# Altium PCB _Mainboard.PcbDoc (part 2 of 2)
Units mm, origin at the board's own origin, x right, y up, seen from the top; angles counter-clockwise.
Board outline 140.34 x 91.44 mm, 2 copper layers (Top Layer, Bottom Layer); 97 components, 48 nets, 329 pads, 204 vias.
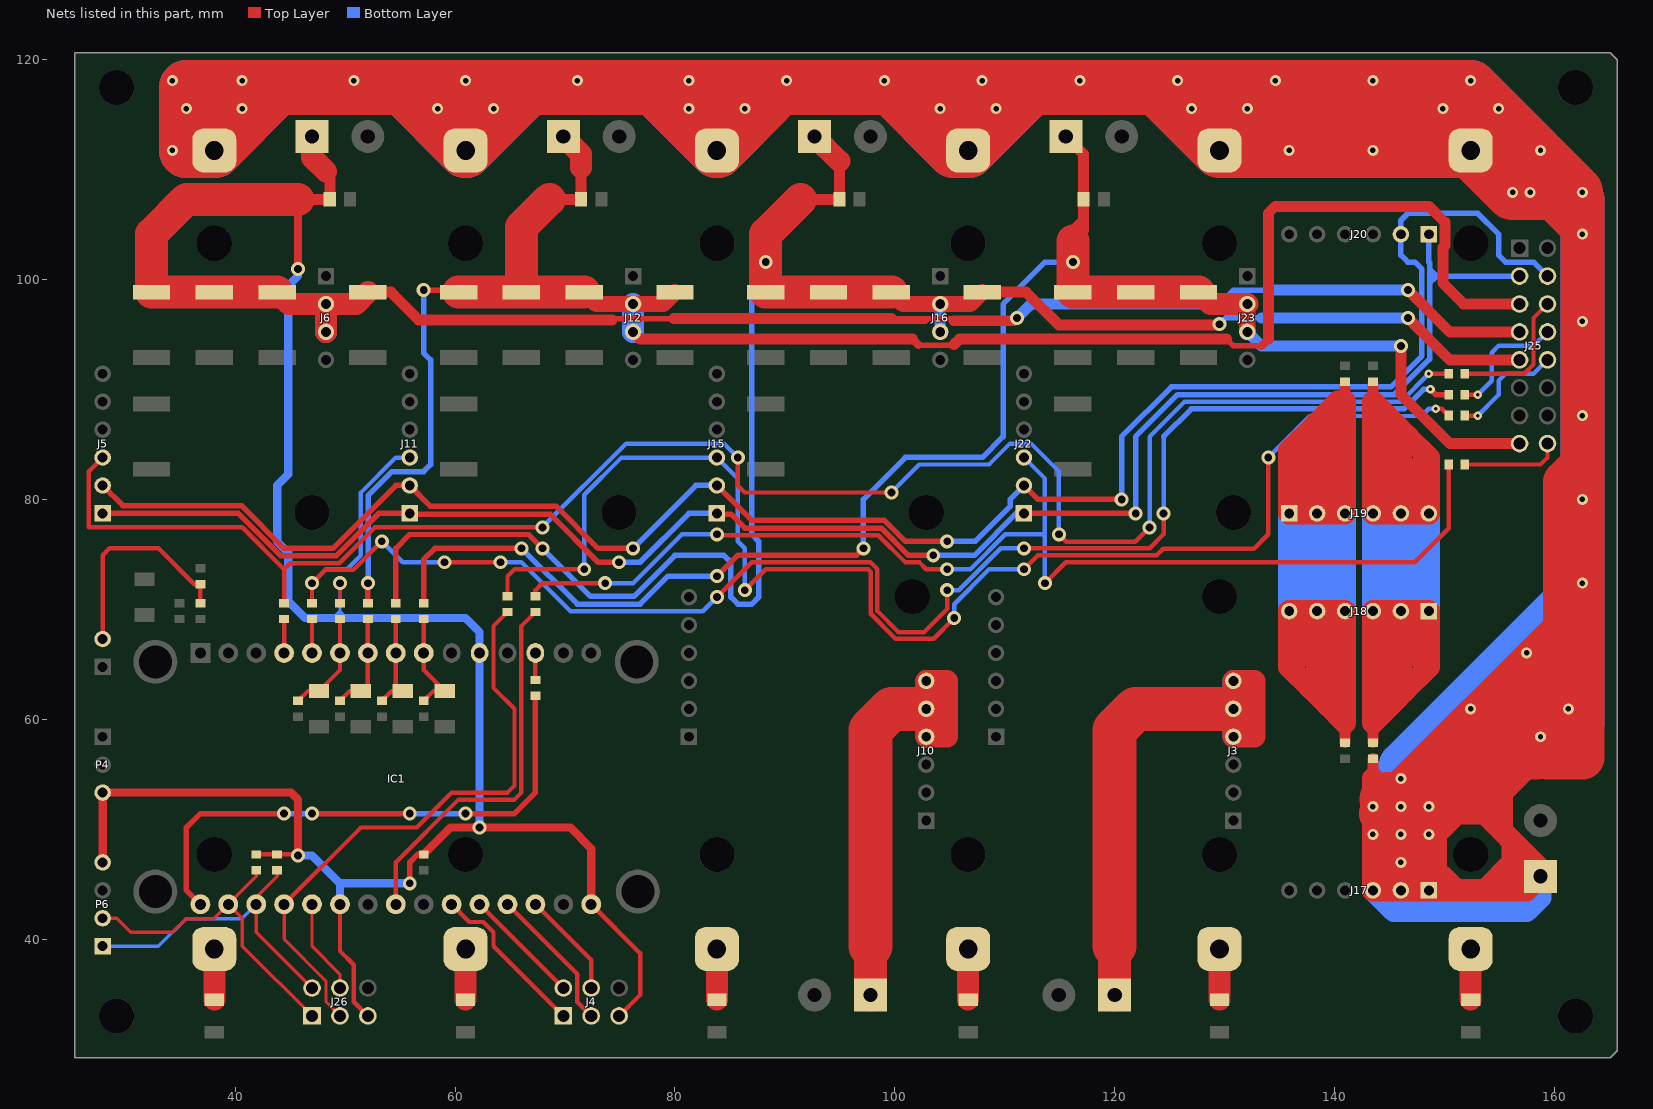
[diagram p2: the nets of this part, all layers, seen from the top]

## Via types
v1: diameter 1, hole 0.5, Top Layer to Bottom Layer, tented both sides, 99 vias
v2: diameter 1.27, hole 0.711, Top Layer to Bottom Layer, tented both sides, 70 vias
v3: diameter 1.2, hole 0.5, Top Layer to Bottom Layer, tented both sides, 30 vias
v4: diameter 0.8, hole 0.3, Top Layer to Bottom Layer, tented both sides, 5 vias

## Nets (pads, with @x,y where several pads share a name; then routed paths per layer and width w, separated by ;. In a path a pad name is that pad's centre, name@x,y a point inside that pad or via, vN(x,y) a via of type N, cw(c..) or ccw(c..) an arc to the next point about the centre after c; other vN are vias at no path point) (continued)
GND_BAT: J17.1 J17.2 J17.3 J24.1 JMP3.1 U1.2 U2.2 U3.2 U4.2 U5.2 U6.2 | length 1007.2
  Top Layer w1: 143.51,54.61 JMP3.1@143.51,56.425
  Top Layer w2: v1(148.59,49.53) 147.637,50.482 ; 150.495,51.435 146.685,51.435 ; 150.812,54.292 153.67,51.435 ; 153.035,56.515 153.67,55.88 153.67,51.435 ; 155.575,56.515 155.257,56.197 155.257,53.34 ; 159.385,56.515 158.433,56.515 155.257,53.34 ; 144.78,44.45 J17.2@146.05,44.45 ; 144.78,44.45 J17.3@143.51,44.45 v1(143.51,49.53) v1(143.51,52.07) 143.51,54.61 145.097,53.023 ; 144.78,44.45 144.78,51.991 144.78,52.705 145.097,53.023 ; 145.097,53.023 145.415,52.705 145.455,52.666 v1(146.05,52.07) ; J17.2@146.05,44.45 147.32,44.45 ; J17.2@146.05,44.45 v1(146.05,46.99) v1(146.05,49.53) v1(146.05,52.07) ; v1(146.05,52.07) 146.685,51.435 ; 146.685,51.435 147.637,50.482 ; 147.32,44.45 J17.1@148.59,44.45 ; 147.32,44.45 147.637,44.767 147.637,50.482 ; J17.1@148.59,44.45 149.86,44.45 ; J17.1@148.59,44.45 148.59,45.72 ; 148.59,45.72 149.225,46.355 149.225,49.53 151.13,51.435 153.67,51.435 ; 148.59,45.72 149.86,44.45 ; 148.59,45.72 149.86,45.72 151.13,44.45 ; 149.86,44.45 151.13,44.45 ; 151.13,44.45 153.67,44.45 ; 153.67,44.45 154.94,44.45 ; 153.67,44.45 156.21,46.99 ; 153.67,51.435 155.257,49.847 ; 154.94,44.45 157.48,44.45 J24.1@158.75,45.72 ; 154.94,44.45 156.21,45.72 ; 155.257,49.847 156.21,48.895 ; 155.257,49.847 155.257,53.34 ; 156.21,45.72 156.21,46.99 ; 156.21,45.72 J24.1@158.75,45.72 ; 156.21,46.99 156.21,48.895 ; 156.21,48.895 158.75,46.355 J24.1@158.75,45.72
  Top Layer w4: 144.224,51.435 144.78,51.991 145.455,52.666 145.494,52.705 160.972,68.183 ; 149.225,52.705 150.812,54.292 153.035,56.515 ; 158.433,56.515 155.575,56.515 153.035,56.515 ; 159.385,107.95 162.56,104.775 ; 161.925,107.95 162.56,107.315 162.56,104.775 ; 153.035,56.515 158.75,62.23 ; 158.75,62.23 159.385,61.595 159.385,56.515 162.56,56.515 162.56,66.04 ; 158.75,62.23 160.972,64.453 ; 160.972,64.453 160.972,68.183 ; 160.972,64.453 162.56,66.04 ; 160.972,68.183 162.56,69.771 ; 160.972,68.183 160.972,81.597 162.56,83.185 ; 162.56,66.04 162.56,69.771 ; 162.56,69.771 v1(162.56,72.39) v1(162.56,80.01) 162.56,83.185 ; 162.56,83.185 v1(162.56,87.63) v1(162.56,96.203) v1(162.56,104.14) 162.56,104.775
  Top Layer w5: 144.78,52.705 145.415,52.705 145.494,52.705 149.225,52.705 ; 37.465,117.475 35.56,117.475 35.56,111.76 U6.2@38.1,111.76 ; 37.465,117.475 38.1,116.84 U6.2@38.1,111.76 ; 37.465,117.475 43.815,117.475 ; U6.2@38.1,111.76 43.815,117.475 ; 43.815,117.475 55.245,117.475 ; 55.245,117.475 U5.2@60.96,111.76 66.675,117.475 ; 55.245,117.475 66.675,117.475 ; 66.675,117.475 78.105,117.475 ; 78.105,117.475 U4.2@83.82,111.76 89.535,117.475 ; 78.105,117.475 89.535,117.475 ; 89.535,117.475 99.695,117.475 ; 99.695,117.475 105.41,111.76 U3.2@106.68,111.76 ; 99.695,117.475 106.045,117.475 ; 106.045,117.475 106.68,116.84 U3.2@106.68,111.76 ; 106.045,117.475 112.395,117.475 ; U3.2@106.68,111.76 112.395,117.475 ; 112.395,117.475 123.825,117.475 ; 123.825,117.475 127.317,113.983 ; 123.825,117.475 152.4,117.475 161.925,107.95 159.385,107.95 v1(157.797,107.95) v1(156.21,107.95) U1.2@152.4,111.76 ; 127.317,113.983 U2.2@129.54,111.76 v1(135.89,111.76) v1(143.51,111.76) U1.2@152.4,111.76 ; 127.317,113.983 150.177,113.983 U1.2@152.4,111.76
  Bottom Layer w2: J17.3@143.51,44.45 143.51,46.355 146.05,46.355 147.955,46.355 149.86,44.45 ; J17.3@143.51,44.45 145.415,42.545 157.48,42.545 158.75,43.815 J24.1@158.75,45.72 ; J17.3@143.51,44.45 J17.2@146.05,44.45 J17.1@148.59,44.45 149.86,44.45 ; 149.86,44.45 155.575,44.45 ; 155.575,44.45 156.845,45.72 J24.1@158.75,45.72 ; 155.575,44.45 157.48,44.45 J24.1@158.75,45.72
  Bottom Layer w4: 123.19,117.475 128.905,111.76 U2.2@129.54,111.76 ; 129.54,116.84 U2.2@129.54,111.76 ; J17.2@146.05,44.45 146.05,46.355 ; v1(158.75,111.76) 161.29,109.22 161.29,108.585 ; U2.2@129.54,111.76 v1(135.89,111.76) v1(143.51,111.76) U1.2@152.4,111.76 155.575,108.585 161.29,108.585 ; 149.86,57.15 154.94,57.15 ; 149.86,57.15 146.05,53.34 v1(146.05,54.61) 146.05,55.88 v1(162.56,72.39) ; 149.86,57.15 162.56,69.85 ; 154.94,57.15 160.02,57.15 162.56,59.69 162.56,64.77 ; 154.94,57.15 162.56,64.77 ; 161.29,108.585 162.56,107.315 v1(162.56,104.14) v1(162.56,96.203) v1(162.56,87.63) v1(162.56,80.01) v1(162.56,72.39) ; 162.56,64.77 162.56,69.85 ; 162.56,69.85 v1(162.56,72.39)
  Bottom Layer w5: U1.2@152.4,111.76 149.542,114.617 ; 158.115,111.76 152.4,117.475 146.685,117.475 ; U6.2@38.1,111.76 35.56,111.76 35.56,117.475 38.735,117.475 ; U6.2@38.1,111.76 38.1,116.84 38.735,117.475 ; U6.2@38.1,111.76 43.815,117.475 ; 38.735,117.475 43.815,117.475 ; 43.815,117.475 55.245,117.475 ; 55.245,117.475 U5.2@60.96,111.76 ; 55.245,117.475 60.96,117.475 ; U5.2@60.96,111.76 60.96,117.475 ; U5.2@60.96,111.76 66.675,117.475 ; 60.96,117.475 66.675,117.475 ; 66.675,117.475 78.105,117.475 ; 78.105,117.475 U4.2@83.82,111.76 ; 78.105,117.475 83.185,117.475 ; 83.185,117.475 83.82,116.84 U4.2@83.82,111.76 ; 83.185,117.475 88.265,117.475 ; U4.2@83.82,111.76 88.265,116.205 88.265,117.475 ; 88.265,117.475 99.695,117.475 ; 99.695,117.475 105.41,111.76 U3.2@106.68,111.76 ; 99.695,117.475 106.045,117.475 ; 106.045,117.475 106.68,116.84 U3.2@106.68,111.76 ; 106.045,117.475 112.395,117.475 ; U3.2@106.68,111.76 112.395,117.475 ; 112.395,117.475 123.19,117.475 130.175,117.475 ; 130.175,117.475 129.54,116.84 131.762,114.617 149.542,114.617 ; 130.175,117.475 146.685,117.475 ; 146.685,117.475 149.542,114.617
  Bottom Layer w7: 146.05,46.355 v1(146.05,46.99) v1(146.05,49.53) v1(146.05,52.07) 146.05,53.34
  other v1: 148.59,52.07 158.75,58.42 152.4,60.96 161.29,60.96 157.48,66.04 162.56,107.95 34.29,111.76 35.56,115.57 40.64,115.57 58.42,115.57 63.5,115.57 81.28,115.57 86.36,115.57 104.14,115.57 109.22,115.57 127,115.57 132.08,115.57 149.86,115.57 154.94,115.57 34.29,118.11 40.64,118.11 50.8,118.11 60.96,118.11 71.12,118.11 81.28,118.11 90.17,118.11 99.06,118.11 107.95,118.11 116.84,118.11 125.73,118.11 134.62,118.11 143.51,118.11 152.4,118.11
GND_BMS: J18.1 J18.2 J18.3 J19.4 J19.5 J19.6 JMP3.2 JMP4.1 | length 156
  Top Layer w1: JMP3.2@143.51,57.875 143.51,59.69 ; 143.51,88.9 JMP4.1@143.51,90.536
  Top Layer w2: 144.78,69.85 144.78,62.23 145.415,61.595 ; 144.78,69.85 J18.2@146.05,69.85 ; 144.78,69.85 J18.3@143.51,69.85 143.51,59.69 145.415,61.595 ; 144.78,78.74 144.78,86.36 145.415,86.995 ; 144.78,78.74 J19.5@146.05,78.74 ; 144.78,78.74 J19.4@143.51,78.74 143.51,88.9 145.415,86.995 ; 145.415,61.595 146.368,62.547 ; 145.415,86.995 146.685,85.725 ; J18.2@146.05,69.85 147.32,69.85 ; J18.2@146.05,69.85 146.05,62.865 146.368,62.547 ; J19.5@146.05,78.74 147.32,78.74 ; J19.5@146.05,78.74 146.05,85.09 146.685,85.725 ; 146.368,62.547 148.59,64.77 ; 146.685,85.725 148.59,83.82 ; 147.32,69.85 147.32,66.04 148.59,64.77 ; 147.32,69.85 J18.1@148.59,69.85 148.59,64.77 ; 147.32,78.74 147.32,82.55 148.59,83.82 ; 147.32,78.74 J19.6@148.59,78.74 148.59,83.82
  Bottom Layer w2: 144.78,69.85 144.78,78.74 ; 144.78,69.85 J18.2@146.05,69.85 ; 144.78,69.85 J18.3@143.51,69.85 J19.4@143.51,78.74 144.78,78.74 ; 144.78,78.74 J19.5@146.05,78.74 ; J18.2@146.05,69.85 147.32,69.85 ; J18.2@146.05,69.85 J19.5@146.05,78.74 ; J19.5@146.05,78.74 147.32,78.74 ; 147.32,69.85 147.32,78.74 ; 147.32,69.85 J18.1@148.59,69.85 J19.6@148.59,78.74 147.32,78.74
NetC1_2: C1.2 C2.2 C3.2 C4.2 C20.2 IC1.11 IC1.16 IC1.25 J1.1 J4.5 J6.2 J6.3 J25.7 J26.5 P4.3 P6.4 R2.2 R3.2 R4.2 R10.1 | length 340.4
  Top Layer w0.3: R10.1@49.53,70.575 v2(49.53,72.39)
  Top Layer w0.4: R3.2@41.91,47.715 R4.2@43.815,47.715 45.63,47.715 v2(45.72,47.625) ; IC1.25@49.53,43.18 49.53,38.938 50.784,37.684 50.784,34.306 J26.5@52.07,33.02 ; IC1.16@72.39,43.18 76.835,38.735 76.835,34.925 J4.5@74.93,33.02
  Top Layer w0.5: v2(55.88,45.085) 55.88,46.99 56.605,47.715 R2.2@57.15,47.715 ; 74.295,96.34 74.405,96.45 79.94,96.45 ; 102.76,96.34 102.87,96.45 105.226,96.45 105.41,96.266 ; v2@111.055,96.45 v2(111.125,96.52)
  Top Layer w0.75: P6.4@27.94,46.99 P4.3@27.94,53.34 45.085,53.34 45.72,52.705 v2(45.72,47.625) ; v2(45.72,100.965) 45.72,107.315 ; R2.2@57.15,47.715 59.6,50.165 v2(62.23,50.165) 70.485,50.165 72.39,48.26 IC1.16@72.39,43.18 ; 99.811,96.34 102.76,96.34
  Top Layer w1: 45.72,107.315 C20.2@48.605,107.315 48.605,109.51 48.26,109.855 ; C4.2@52.07,98.86 54.175,98.86 56.695,96.34 74.295,96.34 ; 79.94,96.45 99.701,96.45 ; 105.41,96.266 110.871,96.266 v2@111.055,96.45 ; v2(146.685,99.06) 150.495,95.25 J25.7@156.845,95.25
  Top Layer w2: C1.2@43.815,98.86 44.885,97.79 J6.2@48.26,97.79 ; J1.1@46.99,113.03 46.99,111.125 48.26,109.855 ; J6.3@48.26,95.25 J6.2@48.26,97.79 ; C4.2@52.07,98.86 51,97.79 J6.2@48.26,97.79
  Top Layer w3: C1.2@43.815,98.86 C2.2@38.1,98.86 C3.2@32.385,98.86 32.385,104.14 35.56,107.315 45.72,107.315
  Bottom Layer w0.3: 48.895,69.215 49.53,69.85 ; 49.53,69.215 49.53,69.85 ; v2(49.53,72.39) 49.53,69.85 ; 50.165,69.215 49.53,69.85
  Bottom Layer w0.5: 129.54,97.79 130.81,99.06 133.985,99.06
  Bottom Layer w0.75: v2(45.72,47.625) 46.99,47.625 49.53,45.085 ; v2(45.72,100.965) 45.72,100.33 44.815,99.425 44.815,82.28 43.815,81.28 43.815,76.2 44.815,75.2 44.815,70.755 46.355,69.215 48.895,69.215 49.53,69.215 50.165,69.215 60.96,69.215 62.23,67.945 IC1.11@62.23,66.04 v2(62.23,50.165) ; IC1.25@49.53,43.18 49.53,45.085 ; v2(55.88,45.085) 49.53,45.085
  Bottom Layer w1: v2(111.125,96.52) 112.395,97.79 129.54,97.79 ; 133.985,99.06 v2(146.685,99.06)
  Bottom Layer w2: J6.3@48.26,95.25 J6.2@48.26,97.79
NetC5_2: C5.2 C6.2 C7.2 C8.2 C21.2 J8.1 J12.2 J12.3 J25.5 R11.1 | length 178.7
  Top Layer w0.5: R11.1@52.07,70.575 v2(52.07,72.39) ; v2(57.15,99.06) 60.125,99.06 C5.2@60.325,98.86 ; 102.165,94.05 105.35,94.05 105.41,94.11 ; 130.175,94.615 130.81,93.98 133.35,93.98
  Top Layer w0.75: 101.6,94.615 102.165,94.05 ; 133.35,93.98 133.985,94.615
  Top Layer w1: 68.58,107.315 C21.2@71.465,107.315 71.465,110.2 ; J12.3@76.2,95.25 76.835,94.615 101.6,94.615 ; 105.41,94.11 105.915,94.615 130.175,94.615 ; 133.985,94.615 133.985,106.045 134.62,106.68 148.59,106.68 150.04,105.23 150.04,103.1 149.86,102.92 149.86,99.695 151.765,97.79 J25.5@156.845,97.79
  Top Layer w1.5: C7.2@71.755,98.86 72.825,97.79 J12.2@76.2,97.79 78.94,97.79 C8.2@80.01,98.86
  Top Layer w2: J8.1@69.85,113.03 71.465,111.415 71.465,110.2
  Top Layer w3: C5.2@60.325,98.86 C6.2@66.04,98.86 ; 68.58,107.315 66.04,104.775 C6.2@66.04,98.86 ; C7.2@71.755,98.86 C6.2@66.04,98.86
  Bottom Layer w0.5: v2(52.07,72.39) 52.085,72.405 52.085,80.376 54.259,82.55 57.15,82.55 57.785,83.185 57.785,92.71 57.15,93.345 v2(57.15,99.06)
  Bottom Layer w2: J12.3@76.2,95.25 J12.2@76.2,97.79
NetC9_2: C9.2 C10.2 C11.2 C12.2 C22.2 J14.1 J16.2 J16.3 J25.9 R12.1 | length 173.3
  Top Layer w0.5: R12.1@54.61,70.575 54.61,75.565 55.865,76.82 66.69,76.82 v2(67.945,75.565)
  Top Layer w1: 91.44,107.315 C22.2@94.96,107.315 94.96,110.78 ; C12.2@107.95,98.86 111.96,98.86 114.935,95.885 129.54,95.885 v2(129.54,95.95) ; v2(146.685,96.52) 150.495,92.71 J25.9@156.845,92.71
  Top Layer w1.5: C11.2@99.695,98.86 100.765,97.79 J16.2@104.14,97.79 106.88,97.79 C12.2@107.95,98.86
  Top Layer w2: J14.1@92.71,113.03 94.96,110.78
  Top Layer w3: 91.44,107.315 88.265,104.14 v2(88.265,101.6) C9.2@88.265,98.86 C10.2@93.98,98.86 C11.2@99.695,98.86
  Bottom Layer w0.5: v2(67.945,75.565) 72.325,71.185 76.265,71.185 80.01,74.93 84.455,74.93 85.09,74.295 85.09,71.12 ; 85.09,71.755 85.09,71.12 ; v2(88.265,101.6) 86.995,100.33 86.995,76.835 87.63,76.2 87.63,71.12 86.995,70.485 85.725,70.485 85.09,71.12 ; v2(129.54,95.95) 130.11,96.52 133.35,96.52
  Bottom Layer w1: J16.3@104.14,95.25 J16.2@104.14,97.79 ; 133.35,96.52 v2(146.685,96.52)
NetC13_2: C13.2 C14.2 C15.2 C23.2 J21.1 J23.2 J23.3 J25.15 R13.1 | length 156.6
  Top Layer w0.5: R13.1@57.15,70.575 57.15,74.559 58.156,75.565 v2(66.04,75.565) ; v2(83.82,73.025) 85.74,74.945 96.535,74.945 v2(97.155,75.565)
  Top Layer w1: J21.1@115.57,113.03 117.185,111.415 C23.2@117.185,107.315 117.185,105.41 ; 119.67,99.205 120.015,98.86 ; v2(146.05,93.98) 146.05,89.535 150.495,85.09 J25.15@156.845,85.09 ; 117.185,105.41 116.205,104.43 116.205,103.505 117.185,104.485 117.185,105.41
  Top Layer w1.5: J23.3@132.08,95.25 J23.2@132.08,97.79
  Top Layer w2: C15.2@127.635,98.86 128.705,97.79 J23.2@132.08,97.79
  Top Layer w3: 116.205,103.505 v2(116.205,101.6) C13.2@116.205,98.86 120.015,98.86 C14.2@121.92,98.86 C15.2@127.635,98.86
  Bottom Layer w0.5: v2(66.04,75.565) 71.12,70.485 76.835,70.485 79.375,73.025 v2(83.82,73.025) ; v2(97.155,75.565) 97.155,80.01 100.98,83.835 107.965,83.835 109.855,85.725 109.855,97.79 113.665,101.6 v2(116.205,101.6)
  Bottom Layer w1: J23.3@132.08,95.25 133.35,93.98 v2(146.05,93.98)
NetD1_1: D1.1 J25.16 | length 9.1
  Top Layer w0.4: D1.1@151.855,83.185 158.75,83.185 159.385,83.82 J25.16@159.385,85.09
NetD1_2: D1.2 D8.1 J22.3 | length 108.5
  Top Layer w0.4: D8.1@67.31,71.21 67.31,71.755 67.945,72.39 v2(73.66,72.39) ; v2(83.82,76.835) 83.9,76.755 98.505,76.755 100.98,74.28 102.25,74.28 102.87,73.66 v2(104.775,73.66) ; v2(113.665,72.39) 115.57,74.295 147.32,74.295 150.405,77.38 D1.2@150.405,83.185
  Bottom Layer w0.4: v2(73.66,72.39) 76.2,72.39 80.645,76.835 v2(83.82,76.835) ; v2(104.775,73.66) 106.888,73.66 110.063,76.835 113.665,76.835 ; J22.3@111.76,83.82 113.665,81.915 113.665,76.835 ; v2(113.665,72.39) 113.665,76.835
NetD2_1: D2.1 J25.10 | length 10.4
  Top Layer w0.4: D2.1@151.855,87.63 v4(153.035,87.63)
  Bottom Layer w0.4: v4(153.035,87.63) 154.94,89.535 154.94,90.805 155.575,91.44 158.115,91.44 J25.10@159.385,92.71
NetD2_2: D2.2 D7.1 J15.3 | length 125.9
  Top Layer w0.4: D7.1@64.77,71.21 64.77,73.025 65.405,73.66 v2(71.755,73.66) ; v2(86.36,71.755) 88.265,73.66 97.576,73.66 97.825,73.411 97.825,69.601 100.081,67.345 103.54,67.345 v2(105.41,69.215) ; v2(111.76,73.66) 113.03,74.93 123.825,74.93 124.425,75.53 132.68,75.53 133.985,76.835 v2(133.985,83.82) ; v4(149.225,88.265) 149.77,88.265 D2.2@150.405,87.63
  Bottom Layer w0.4: v2(71.755,73.66) 71.755,80.431 75.144,83.82 J15.3@83.82,83.82 85.725,81.915 85.725,76.2 86.36,75.565 v2(86.36,71.755) ; v2(105.41,69.215) 105.41,70.485 108.585,73.66 v2(111.76,73.66) ; v2(133.985,83.82) 137.765,87.6 147.925,87.6 148.59,88.265 v4(149.225,88.265)
NetD3_1: D3.1 J25.8 | length 11.4
  Top Layer w0.4: D3.1@151.855,89.535 v4(153.035,89.535)
  Bottom Layer w0.4: v4(153.035,89.535) 154.305,90.805 154.305,93.345 154.94,93.98 158.115,93.98 J25.8@159.385,95.25
NetD3_2: D3.2 D6.1 J11.3 | length 148.7
  Top Layer w0.4: D6.1@46.99,70.575 v2(46.99,72.39) 48.215,73.615 50.755,73.615 v2(53.34,76.2) ; v2(59.055,74.295) v2(64.135,74.295) ; v2(83.82,71.12) 86.995,74.295 97.79,74.295 98.425,73.66 98.425,69.85 100.33,67.945 102.676,67.945 104.775,70.044 v2(104.775,71.755) ; v2(111.76,75.565) 123.19,75.565 124.46,76.835 v2(124.46,78.74)
  Top Layer w0.5: v4(148.732,90.028) 149.225,89.535 D3.2@150.405,89.535
  Bottom Layer w0.4: v2(46.99,72.39) 48.26,73.66 50.165,73.66 51.435,74.93 51.435,80.645 54.61,83.82 J11.3@55.88,83.82 ; v2(53.34,76.2) 55.245,74.295 v2(59.055,74.295) ; v2(64.135,74.295) 66.04,74.295 70.5,69.835 82.535,69.835 v2(83.82,71.12) ; v2(104.775,71.755) 105.831,71.755 109.641,75.565 v2(111.76,75.565) ; v2(124.46,78.74) 124.46,85.725
  Bottom Layer w0.5: 124.46,85.725 126.985,88.25 146.319,88.25 148.097,90.028 v4(148.732,90.028)
NetD4_1: D4.1 J25.6 | length 12.6
  Top Layer w0.4: D4.1@151.855,91.44 157.272,91.44 158.115,92.283 158.115,96.52 J25.6@159.385,97.79
NetD4_2: D4.2 D5.1 J5.3 | length 163.6
  Top Layer w0.4: J5.3@27.94,83.82 26.67,82.55 26.67,77.47 40.636,77.47 44.446,73.66 44.45,73.66 ; D5.1@44.45,70.575 44.45,73.66 ; v2(67.945,77.47) 52.709,77.47 49.454,74.215 45.005,74.215 44.45,73.66 ; v2(85.725,83.82) 85.725,81.28 86.36,80.645 v2(99.695,80.645) v2@99.955,80.645 ; v2(114.935,76.835) 115.605,76.165 121.885,76.165 v2(123.19,77.47) ; v4(148.59,91.44) D4.2@150.405,91.44
  Bottom Layer w0.4: v2(67.945,77.47) 75.565,85.09 84.455,85.09 v2(85.725,83.82) ; v2(99.695,80.645) 102.235,83.185 108.585,83.185 110.49,85.09 112.395,85.09 114.935,82.55 v2(114.935,76.835) ; v2(123.19,77.47) 123.19,85.725 126.365,88.9 146.05,88.9 v4(148.59,91.44)
NetD5_2: D5.2 IC1.4 | length 3.1
  Top Layer w0.4: IC1.4@44.45,66.04 D5.2@44.45,69.125
NetD6_2: D6.2 IC1.5 | length 3.1
  Top Layer w0.4: IC1.5@46.99,66.04 D6.2@46.99,69.125
NetD7_2: D7.2 IC1.27 J26.3 | length 56.1
  Top Layer w0.3: IC1.27@44.45,43.18 44.45,40.005 48.26,36.195 48.26,34.29 J26.3@49.53,33.02
  Top Layer w0.4: IC1.27@44.45,43.18 51.435,50.165 56.515,50.165 59.69,53.34 64.77,53.34 65.405,53.975 65.405,60.96 63.5,62.865 ; 63.5,64.135 63.5,62.865 ; D7.2@64.77,69.76 63.5,68.49 63.5,62.865
NetD8_2: D8.2 IC1.23 | length 34.8
  Top Layer w0.4: IC1.23@54.61,43.18 54.61,46.99 60.325,52.705 65.405,52.705 66.04,53.34 66.04,58.42 66.04,68.49 D8.2@67.31,69.76
NetF1_2: F1.2 U1.1 | length 4.6
  Top Layer w2: F1.2@152.4,34.495 U1.1@152.4,39.116
NetF2_2: F2.2 U2.1 | length 4.6
  Top Layer w2: F2.2@129.54,34.495 U2.1@129.54,39.116
NetF3_2: F3.2 U3.1 | length 4.6
  Top Layer w2: F3.2@106.68,34.495 U3.1@106.68,39.116
NetF4_2: F4.2 U4.1 | length 4.6
  Top Layer w2: F4.2@83.82,34.495 U4.1@83.82,39.116
NetF5_2: F5.2 U5.1 | length 4.6
  Top Layer w2: F5.2@60.96,34.495 U5.1@60.96,39.116
NetF6_2: F6.2 U6.1 | length 4.6
  Top Layer w2: F6.2@38.1,34.495 U6.1@38.1,39.116
NetIC1_6: IC1.6 R10.2 R15.1 ZD2.2 | length 9.6
  Top Layer w0.4: R15.1@45.72,61.685 46.62,62.585 ZD2.2@47.625,62.585 49.53,64.49 IC1.6@49.53,66.04 R10.2@49.53,69.125
NetIC1_7: IC1.7 R11.2 R16.1 ZD3.2 | length 9.1
  Top Layer w0.4: R16.1@49.53,61.685 50.43,62.585 ZD3.2@51.435,62.585 52.07,63.22 IC1.7@52.07,66.04 R11.2@52.07,69.125
NetIC1_8: IC1.8 R12.2 R17.1 ZD4.2 | length 9.1
  Top Layer w0.4: R17.1@53.34,61.685 54.24,62.585 ZD4.2@55.245,62.585 54.61,63.22 IC1.8@54.61,66.04 R12.2@54.61,69.125
NetIC1_9: IC1.9 R13.2 R18.1 ZD5.2 | length 9.6
  Top Layer w0.4: R18.1@57.15,61.685 58.05,62.585 ZD5.2@59.055,62.585 57.15,64.49 IC1.9@57.15,66.04 R13.2@57.15,69.125
NetIC1_13: IC1.13 R5.1 | length 2.5
  Top Layer w0.4: R5.1@67.31,63.59 IC1.13@67.31,66.04
NetIC1_18: IC1.18 J4.4 | length 9.7
  Top Layer w0.4: IC1.18@67.31,43.18 72.39,38.1 J4.4@72.39,35.56
NetIC1_19: IC1.19 J4.3 | length 13.3
  Top Layer w0.4: IC1.19@64.77,43.18 71.12,36.83 71.12,34.29 J4.3@72.39,33.02
NetIC1_20: IC1.20 J4.2 | length 10.8
  Top Layer w0.4: IC1.20@62.23,43.18 J4.2@69.85,35.56
NetIC1_21: IC1.21 J4.1 | length 15.1
  Top Layer w0.4: IC1.21@59.69,43.18 61.3,41.57 62.57,41.57 63.5,40.64 63.5,39.37 J4.1@69.85,33.02
NetIC1_26: IC1.26 J26.4 | length 8.7
  Top Layer w0.3: IC1.26@46.99,43.18 46.99,39.37 49.53,36.83 J26.4@49.53,35.56
NetIC1_30: IC1.30 R5.2 | length 49.4
  Top Layer w0.5: IC1.30@36.83,43.18 35.56,44.45 35.56,50.165 36.83,51.435 v2(44.45,51.435) ; v2(46.99,51.435) v2(55.88,51.435) ; v2(60.96,51.435) 65.405,51.435 67.31,53.34 R5.2@67.31,62.14
  Bottom Layer w0.5: v2(44.45,51.435) v2(46.99,51.435) ; v2(55.88,51.435) v2(60.96,51.435)
NetJ3_4: J3.4 J3.5 J3.6 J7.1 | length 54.8
  Top Layer w2: J3.4@130.81,58.42 132.715,58.42 132.715,63.5 J3.6@130.81,63.5 J3.5@130.81,60.96 J3.4@130.81,58.42
  Top Layer w3: J7.1@120.015,34.925 120.015,39.37
  Top Layer w4: 120.015,39.37 120.015,59.055 121.92,60.96 J3.5@130.81,60.96
  Bottom Layer w2: J3.4@130.81,58.42 J3.5@130.81,60.96 J3.6@130.81,63.5
NetJ5_1: J5.1 J11.1 J15.1 J20.1 J22.1 J25.3 | length 162
  Top Layer w0.5: J5.1@27.94,78.74 40.285,78.74 44.16,74.865 49.185,74.865 53.06,78.74 J11.1@55.88,78.74 55.88,78.675 68.645,78.675 73.025,74.295 v2(74.93,74.295) ; J15.1@83.82,78.74 83.885,78.675 85.09,78.675 86.36,77.405 98.774,77.405 101.249,74.93 v2(103.505,74.93) ; J22.1@111.76,78.74 v2(121.92,78.74)
  Bottom Layer w0.5: v2(74.93,74.295) 76.835,74.295 81.28,78.74 J15.1@83.82,78.74 ; v2(103.505,74.93) 107.239,74.93 111.049,78.74 J22.1@111.76,78.74 ; v2(121.92,78.74) 121.92,85.725 125.745,89.55 145.43,89.55 148.655,92.775 148.655,99.695 ; J20.1@148.59,104.14 148.59,101.6 148.655,101.535 148.655,100.965 ; J25.3@156.845,100.33 149.225,100.33 ; 148.655,99.695 149.225,100.265 149.225,100.33 ; 148.655,99.695 148.655,100.33 ; 148.655,100.33 149.225,100.33 ; 148.655,100.33 148.655,100.965 ; 148.655,100.965 149.225,100.395 149.225,100.33
NetJ5_2: J5.2 J11.2 J15.2 J20.2 J22.2 J25.4 | length 173.9
  Top Layer w0.5: J5.2@27.94,81.28 29.78,79.44 40.575,79.44 44.45,75.565 48.895,75.565 54.61,81.28 J11.2@55.88,81.28 57.785,79.375 69.215,79.375 73.025,75.565 v2(76.2,75.565) ; J15.2@83.82,81.28 86.995,78.105 99.064,78.105 100.969,76.2 v2(104.775,76.2) ; J22.2@111.76,81.28 113.03,80.01 v2(120.65,80.01)
  Bottom Layer w0.5: v2(76.2,75.565) 81.915,81.28 J15.2@83.82,81.28 ; v2(104.775,76.2) 107.315,76.2 110.49,79.375 110.49,80.01 J22.2@111.76,81.28 ; v2(120.65,80.01) 120.65,85.725 125.175,90.25 145.14,90.25 147.955,93.065 147.955,100.965 147.32,101.6 146.685,101.6 146.05,102.235 J20.2@146.05,104.14 146.05,105.41 146.685,106.045 153.035,106.045 154.94,104.14 154.94,102.235 155.575,101.6 158.115,101.6 J25.4@159.385,100.33
NetJ10_4: J10.4 J10.5 J10.6 J13.1 | length 49
  Top Layer w2: J10.4@102.87,58.42 104.775,58.42 104.775,63.5 J10.6@102.87,63.5 J10.5@102.87,60.96 J10.4@102.87,58.42
  Top Layer w3: J13.1@97.79,34.925 97.79,39.37
  Top Layer w4: 97.79,39.37 97.79,59.055 99.695,60.96 J10.5@102.87,60.96
  Bottom Layer w2: J10.4@102.87,58.42 J10.5@102.87,60.96 J10.6@102.87,63.5
NetJ18_4: J18.4 J18.5 J18.6 J19.1 J19.2 J19.3 JMP1.2 JMP2.1 | length 159
  Top Layer w1: JMP1.2@140.97,57.875 140.97,59.69 ; 140.97,88.9 140.97,90.17
  Top Layer w2: 135.89,64.77 137.16,66.04 137.16,69.85 ; 135.89,64.77 137.795,62.865 ; 135.89,64.77 J18.6@135.89,69.85 137.16,69.85 ; 136.843,85.407 138.43,86.995 ; 136.843,85.407 135.89,84.455 J19.1@135.89,78.74 137.16,78.74 ; 136.843,85.407 137.16,85.09 137.16,78.74 ; 137.16,69.85 J18.5@138.43,69.85 ; 137.16,78.74 J19.2@138.43,78.74 ; 137.795,62.865 139.382,61.277 ; 137.795,62.865 138.43,63.5 J18.5@138.43,69.85 ; J18.5@138.43,69.85 139.7,69.85 ; J19.2@138.43,78.74 139.7,78.74 ; J19.2@138.43,78.74 138.43,86.995 ; 138.43,86.995 139.382,87.947 ; 139.382,61.277 140.97,59.69 J18.4@140.97,69.85 139.7,69.85 ; 139.382,61.277 139.382,69.532 139.7,69.85 ; 139.382,87.947 140.335,88.9 140.97,88.9 J19.3@140.97,78.74 139.7,78.74 ; 139.382,87.947 139.7,87.63 139.7,78.74
  Bottom Layer w2: 137.16,69.85 137.16,78.74 ; 137.16,69.85 J18.5@138.43,69.85 ; 137.16,69.85 J18.6@135.89,69.85 J19.1@135.89,78.74 137.16,78.74 ; 137.16,78.74 J19.2@138.43,78.74 ; J18.5@138.43,69.85 139.7,69.85 ; J18.5@138.43,69.85 J19.2@138.43,78.74 ; J19.2@138.43,78.74 139.7,78.74 ; 139.7,69.85 139.7,78.74 ; 139.7,69.85 J18.4@140.97,69.85 J19.3@140.97,78.74 139.7,78.74
NetJMP5_1: JMP5.1 P5.2 R6.2 | length 19.9
  Top Layer w0.4: P5.2@27.94,67.31 27.94,74.93 28.575,75.565 33.02,75.565 36.285,72.3 JMP5.1@36.83,72.3 R6.2@36.83,70.575
scl: IC1.29 J26.1 P6.2 R3.1 | length 30.5
  Top Layer w0.3: P6.2@27.94,41.91 29.21,41.91 30.48,40.64 34.29,40.64 35.526,41.876 38.066,41.876 IC1.29@39.37,43.18 ; R3.1@41.91,46.265 41.91,45.72 IC1.29@39.37,43.18 ; J26.1@46.99,33.02 40.64,39.37 40.64,41.91 IC1.29@39.37,43.18
sda: IC1.28 J26.2 P6.1 R4.1 | length 29.1
  Top Layer w0.3: R4.1@43.815,46.265 43.815,45.72 41.91,43.815 IC1.28@41.91,43.18 41.91,40.64 J26.2@46.99,35.56
  Bottom Layer w0.3: P6.1@27.94,39.37 33.02,39.37 35.526,41.876 40.606,41.876 IC1.28@41.91,43.18
pads on no net: IC1.2 IC1.3 IC1.12 IC1.15 IC1.31
copper on no net: | length 0.2
  Top Layer w0.5: 159.385,92.492 159.385,92.71

## Polygon pours and split planes (outlines as drawn)
GND on Top Layer "GND" (solid, remove dead copper, shelved, pour order 1): 25.4,29.21 25.4,120.65 165.1,120.65 165.735,120.015 165.735,29.845 165.1,29.21
GND on Bottom Layer "GND" (solid, remove dead copper, shelved, pour order 2): 25.4,29.21 25.4,120.65 165.1,120.65 165.735,120.015 165.735,29.845 165.1,29.21

## Other copper
Multi-Layer:
  lines w0.8: 25.4,120.65 165.735,120.65
  lines w1: 25.4,120.65 25.4,28.575 164.465,28.575 165.735,29.845 165.735,120.65

## Silkscreen, mask and mechanical layers (free items; w line width, h text height)
Top Overlay:
  drawing of 45 lines, arcs and shapes, not listed
  text "1" at 58.42,118.745 h3 r180
  text "2" at 81.28,118.745 h3 r180
  text "3" at 104.14,118.745 h3 r180
  text "4" at 126.365,118.745 h3 r180
  text "-" at 51.435,117.475 h3
  text "-" at 74.295,117.475 h3
  text "-" at 97.155,117.475 h3
  text "-" at 120.015,117.475 h3
  text "+" at 40.64,114.935 h3
  text "+" at 63.5,114.935 h3
  text "+" at 86.36,114.935 h3
  text "+" at 108.585,114.935 h3
  text "IoT Battery pack v2.1 / www.irnas.eu / License: Cern OHL" at 133.35,112.395 h1
  text ">" at 149.86,90.805 h1
  text ">" at 149.86,88.9 h1
  text ">" at 149.86,86.995 h1
  text "FUEL GAUGE" at 136.525,85.09 h1.5
  text ">" at 149.86,82.55 h1
  text "VOUT M1" at 39.37,81.28 h1.5
  text "VOUT M2" at 66.675,81.28 h1.5
  text "VOUT M3" at 94.615,81.28 h1.5
  text "VOUT M4" at 122.555,81.28 h1.5
  text ">" at 64.135,72.39 h1 r270
  text ">" at 66.675,72.39 h1 r270
  text ">" at 43.815,71.755 h1 r270
  text ">" at 46.355,71.755 h1 r270
  text "AD0" at 29.845,62.23 h1
  text "PROTECTION" at 136.525,62.23 h1.5
  text "GND" at 29.845,60.96 h1
  text "GND" at 29.845,55.245 h1
  text "+" at 160.655,55.245 h3
  text "BAT" at 159.385,54.61 h3 r90
  text "1wire" at 29.845,53.975 h1
  text "VCC" at 29.845,52.705 h1
  text "CHARGING 1" at 85.725,42.545 h1.5
  text "CHARGING 2" at 113.03,42.545 h1.5
  text "VCC" at 29.845,40.64 h1
  text "GND" at 29.845,39.37 h1
  text "-" at 163.195,38.735 h3 r90
  text "SDA" at 29.845,38.1 h1
  text "SCL" at 29.845,36.83 h1
  text "-" at 86.995,33.655 h3
  text "+" at 101.6,33.655 h3
  text "-" at 109.22,33.655 h3
  text "+" at 123.825,33.655 h3
  text "2,5A" at 59.69,31.75 h1 r90
  text "2,5A" at 82.55,31.75 h1 r90
  text "2,5A" at 105.41,31.75 h1 r90
  text "2,5A" at 128.27,31.75 h1 r90
  text "2,5A" at 151.13,31.75 h1 r90
  text "2,5A" at 36.195,31.115 h1 r90

## Text inside footprints (layer, text, board x,y; h text height)
J4: Top Overlay "1" at 64.135,32.385 h1.1
J25: Top Overlay "16" at 160.02,77.47 h1.1 r90; Top Overlay "1" at 156.845,109.22 h1.1 r90
J26: Top Overlay "1" at 41.275,32.385 h1.1
U1: Bottom Overlay "+" at 154.94,37.465 h5 r270; Bottom Overlay "-" at 155.194,106.537 h5 r270
U2: Bottom Overlay "+" at 132.08,37.465 h5 r270; Bottom Overlay "-" at 132.334,106.537 h5 r270
U3: Bottom Overlay "+" at 109.22,37.465 h5 r270; Bottom Overlay "-" at 109.474,106.537 h5 r270
U4: Bottom Overlay "+" at 86.36,37.465 h5 r270; Bottom Overlay "-" at 86.614,106.537 h5 r270
U5: Bottom Overlay "+" at 63.5,37.465 h5 r270; Bottom Overlay "-" at 63.754,106.537 h5 r270
U6: Bottom Overlay "+" at 40.64,37.465 h5 r270; Bottom Overlay "-" at 40.894,106.537 h5 r270